# EAGLE board edw pcb (EAGLE 9.6.2)
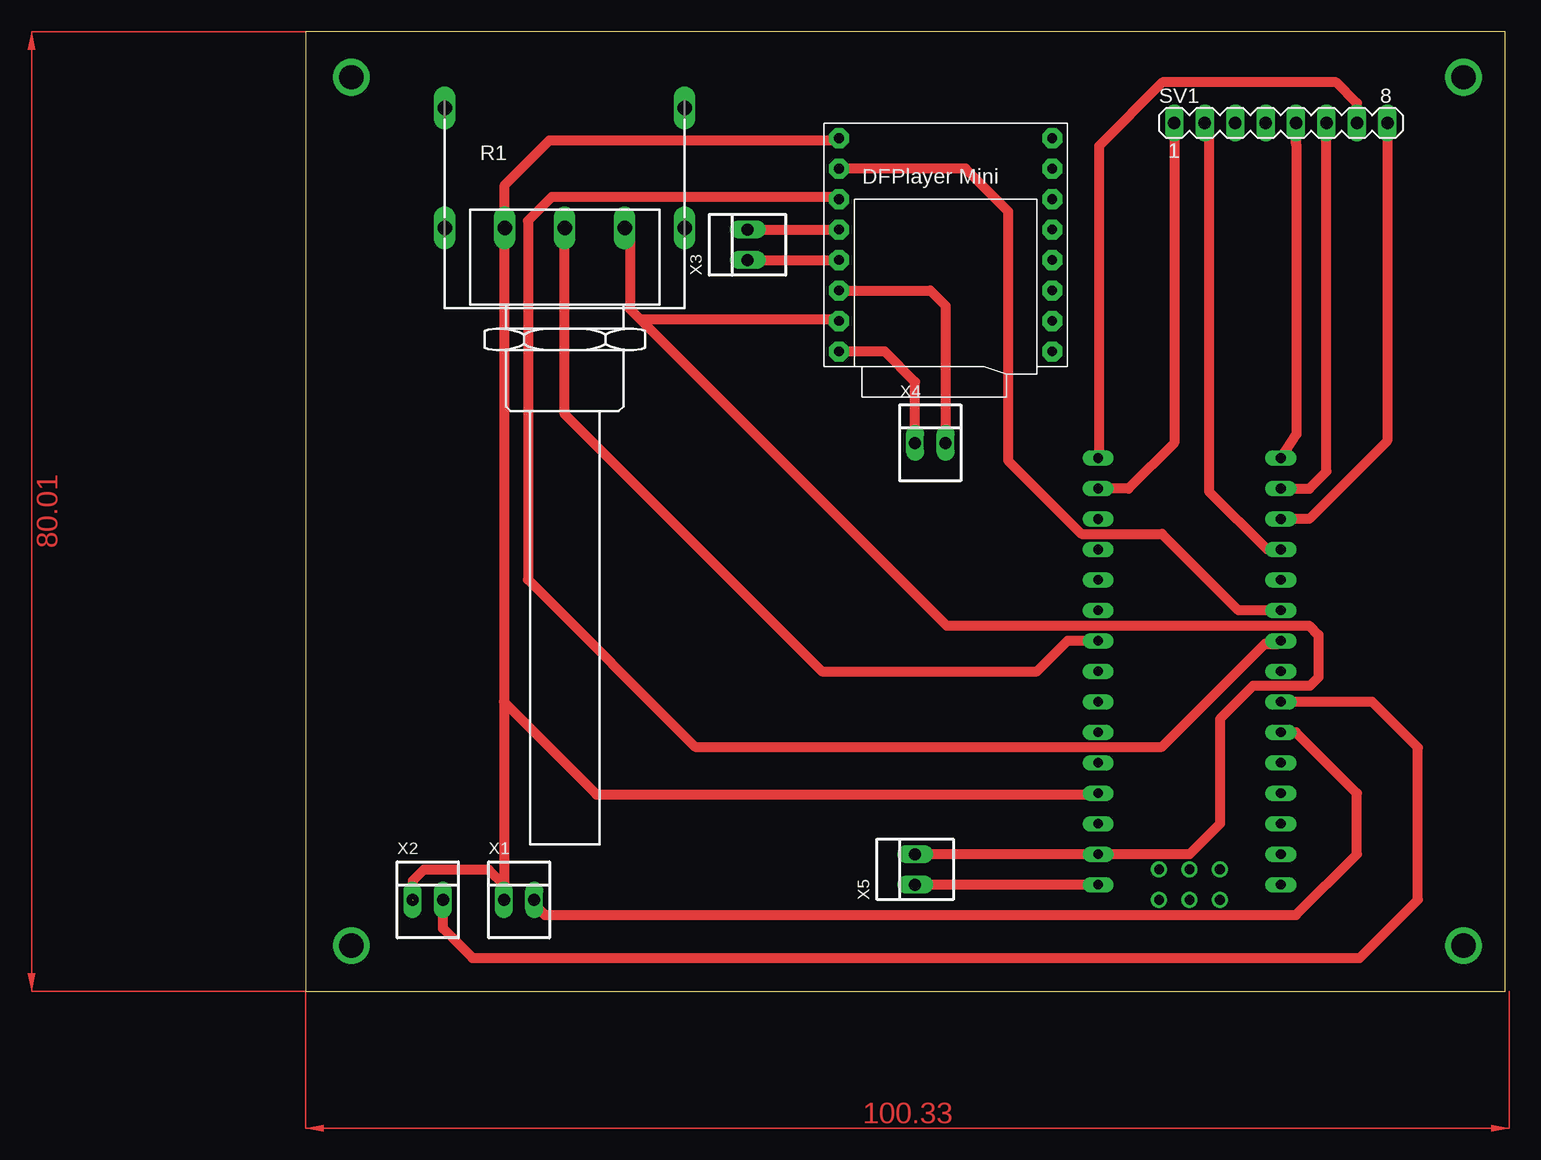
[diagram p0: board, top side]

Size 100 x 80 mm. Coordinates in mm from the lower left corner, seen from the top.
Outline: 0,0 100,0 100,80 0,80 0,0
Copper layers (1*16): Top 0.035mm / dielectric 1.5mm / Bottom 0.035mm
Design rules "default": minimum track width 6mil, minimum drill 0.35mm, track to track 6mil, track to pad 6mil, pad to pad 6mil, via to via 6mil, smd to smd 6mil, copper to edge 40mil, drill to drill 6mil, minimum pad ring 10mil, minimum via ring 8mil, stop-mask expansion 4mil, vias tented up to drill 0mil, thermal gap 10mil
Net classes: 0 default: width 0.813 mm

## Footprints (pad centres in the part's own frame; a part is rotated, then mirrored left to right if it is on the bottom)
PC16-SHM2 = drill 1.2 long: 1A -5,6.5; 1E 5,6.5; 1S 0,6.5; M1 -10,6.5; M2 10,6.5; M3 10,16.5; M4 -10,16.5
MA08-1 = drill 1.016 long: 1 -8.89,0; 2 -6.35,0; 3 -3.81,0; 4 -1.27,0; 5 1.27,0; 6 3.81,0; 7 6.35,0; 8 8.89,0
NANO = drill 0.8 long: 3.3V -10.16,24.13; 5V -10.16,-1.27; A0 -10.16,19.05; A1 -10.16,16.51; A2 -10.16,13.97; A3 -10.16,11.43; A4 -10.16,8.89; A5 -10.16,6.35; A6 -10.16,3.81; A7 -10.16,1.27; AREF -10.16,21.59; D2 5.08,1.27; D3 5.08,3.81; D4 5.08,6.35; D5 5.08,8.89; D6 5.08,11.43; D7 5.08,13.97; D8 5.08,16.51; D9 5.08,19.05; D10 5.08,21.59; D11 5.08,24.13; D12 5.08,26.67; D13 -10.16,26.67; GND -10.16,-6.35; GND1 5.08,-1.27; RAW -10.16,-8.89; RST -10.16,-3.81; RST1 5.08,-3.81; RX1 5.08,-6.35; TX0 5.08,-8.89 | drill 0.8: ICSP1 -5.08,-10.16; ICSP2 -5.08,-7.62; ICSP3 -2.54,-10.16; ICSP4 -2.54,-7.62; ICSP5 0,-10.16; ICSP6 0,-7.62
DFPLAYER = drill 0.8 pad 1.676 octagon: ADKEY1 8.89,-1.27; ADKEY2 8.89,1.27; BUSY 8.89,8.89; DAC_L -8.89,-1.27; DAC_R -8.89,1.27; GND_1 -8.89,-6.35; GND_2 8.89,-6.35; IO1 8.89,-8.89; IO2 8.89,-3.81; RX -8.89,6.35; SPK1 -8.89,-3.81; SPK2 -8.89,-8.89; TX -8.89,3.81; USB+ 8.89,3.81; USB- 8.89,6.35; VCC -8.89,8.89
22-23-2021 = drill 1 long: 1 -1.27,0; 2 1.27,0

## Placement (x,y rotation side)
R1  PC16-SHM2  [PC16-SHM2]  21.59,57.15 0 top
SV1  [MA08-1]  81.28,72.39 0 top
U$1  NANO  [NANO]  76.2,17.78 0 top
U$2  DFPLAYER  [DFPLAYER]  53.34,62.23 0 top
X1  22-23-2021  [22-23-2021]  17.78,7.62 0 top
X2  22-23-2021  [22-23-2021]  10.16,7.62 0 top
X3  22-23-2021  [22-23-2021]  36.83,62.23 90 top
X4  22-23-2021  [22-23-2021]  52.07,45.72 0 top
X5  22-23-2021  [22-23-2021]  50.8,10.16 90 top

## Library data of the parts
R1 = piher; OC_FARNELL: unknown; OC_NEWARK: unknown
SV1 = con-lstb; OC_FARNELL: unknown; OC_NEWARK: unknown
U$1 = arduino
U$2 = df
X1-X5 = con-molex; MF: MOLEX; MPN: 22-23-2021; OC_FARNELL: 1462926; OC_NEWARK: 25C3832

## Nets
N$1: R1.1A U$1.5V U$2.VCC X1.1 X2.1
N$2: U$1.D7 U$2.RX
N$3: U$1.D6 U$2.TX
N$5: R1.1E U$1.GND U$2.GND_1 X5.2
N$6: U$2.DAC_R X3.2
N$7: U$2.DAC_L X3.1
N$8: U$2.SPK1 X4.2
N$9: U$2.SPK2 X4.1
N$10: SV1.8 U$1.D10
N$11: SV1.7 U$1.D13
N$12: SV1.6 U$1.D11
N$13: SV1.5 U$1.D12
N$14: SV1.3 U$1.GND1
N$15: SV1.2 U$1.D9
N$16: SV1.1 U$1.3.3V
N$17: R1.1S U$1.A3
N$18: U$1.RAW X5.1
N$19: U$1.D3 X1.2
N$20: U$1.D4 X2.2

## Tracks (layer width: path | path; a pad name or v marks a point on that pad's centre or on a via)
N$1  (1 unrouted)
  Top 0.813: U$2.VCC 44.4,70.94 20.32,70.94 16.59,67.21 R1.1A 16.51,63.57 16.51,24.13 | U$1.5V 65.63,16.41 24.23,16.41 16.51,24.13 | 8.91,7.59 8.91,9.22 9.83,10.13 15.24,10.13 16.51,8.87 X1.1 16.51,24.13
N$2
  Top 0.813: U$1.D7 77.75,31.75 71.37,38.12 64.67,38.12 58.55,44.25 58.55,65.02 54.99,68.58 U$2.RX
N$3
  Top 0.813: U$1.D6 81.08,28.96 79.96,28.96 71.37,20.37 32.46,20.37 18.52,34.31 18.52,64.24 20.52,66.24 44.25,66.24 U$2.TX
N$4  (via drill 2.03 pad 0.75)
  other vias: 3.81,76.2
N$5
  Top 0.813: 27.91,55.98 44.4,55.98 U$2.GND_1 | 27.91,55.98 27.03,56.87 27.03,63.22 R1.1E | X5.2 U$1.GND 73.66,11.43 76.2,13.97 76.2,22.69 78.97,25.46 83.71,25.46 84.42,26.17 84.42,29.71 83.65,30.48 53.42,30.48 27.91,55.98
N$6
  Top 0.813: X3.2 U$2.DAC_R
N$7
  Top 0.813: X3.1 U$2.DAC_L
N$8
  Top 0.813: U$2.SPK1 52.07,58.42 53.34,57.15 X4.2
N$9
  Top 0.813: X4.1 50.8,50.8 48.26,53.34 U$2.SPK2
N$10
  Top 0.813: U$1.D10 83.64,39.37 90.14,45.87 90.14,71.83 90.17,71.8 SV1.8
N$11
  Top 0.813: SV1.7 87.63,74.04 85.9,75.77 71.42,75.77 66.12,70.46 66.12,44.88 U$1.D13
N$12
  Top 0.813: 84.94,72.08 SV1.6 85.09,43.33 83.67,41.91 U$1.D11
N$13
  Top 0.813: U$1.D12 82.58,46.45 82.58,70.53 82.55,70.83 SV1.5
N$15
  Top 0.813: U$1.D9 80.14,36.83 75.29,41.68 75.29,72.08 SV1.2
N$16
  Top 0.813: U$1.3.3V 68.58,41.91 72.39,45.72 SV1.1
N$17
  Top 0.813: U$1.A3 63.5,29.21 60.96,26.67 43.03,26.67 21.59,48.11 R1.1S
N$18
  Top 0.813: U$1.RAW X5.1
N$19
  Top 0.813: X1.2 19.05,7.24 19.94,6.35 82.55,6.35 87.63,11.43 87.63,16.51 82.55,21.59 U$1.D3
N$20
  Top 0.813: 81.08,24.13 U$1.D4 88.9,24.13 92.71,20.32 92.71,7.62 87.86,2.77 13.89,2.77 11.43,5.23 X2.2
N$21  (via drill 2.03 pad 0.75)
  other vias: 96.52,76.2
N$22  (via drill 2.03 pad 0.75)
  other vias: 3.81,3.81
N$23  (via drill 2.03 pad 0.75)
  other vias: 96.52,3.81
(copper drawn outside any net)
  shapes: Top area x2